# Altium PCB NumatoShieldPreRoute.PcbDoc
Units mm, origin at the board's own origin, x right, y up, seen from the top; angles counter-clockwise.
Board outline 127 x 127 mm, 4 copper layers (Top Layer, Mid-Layer 1, Mid-Layer 2, Bottom Layer); 8 components, 163 nets, 352 pads, 0 vias.
Unrouted connection lines stored in the file: 189.
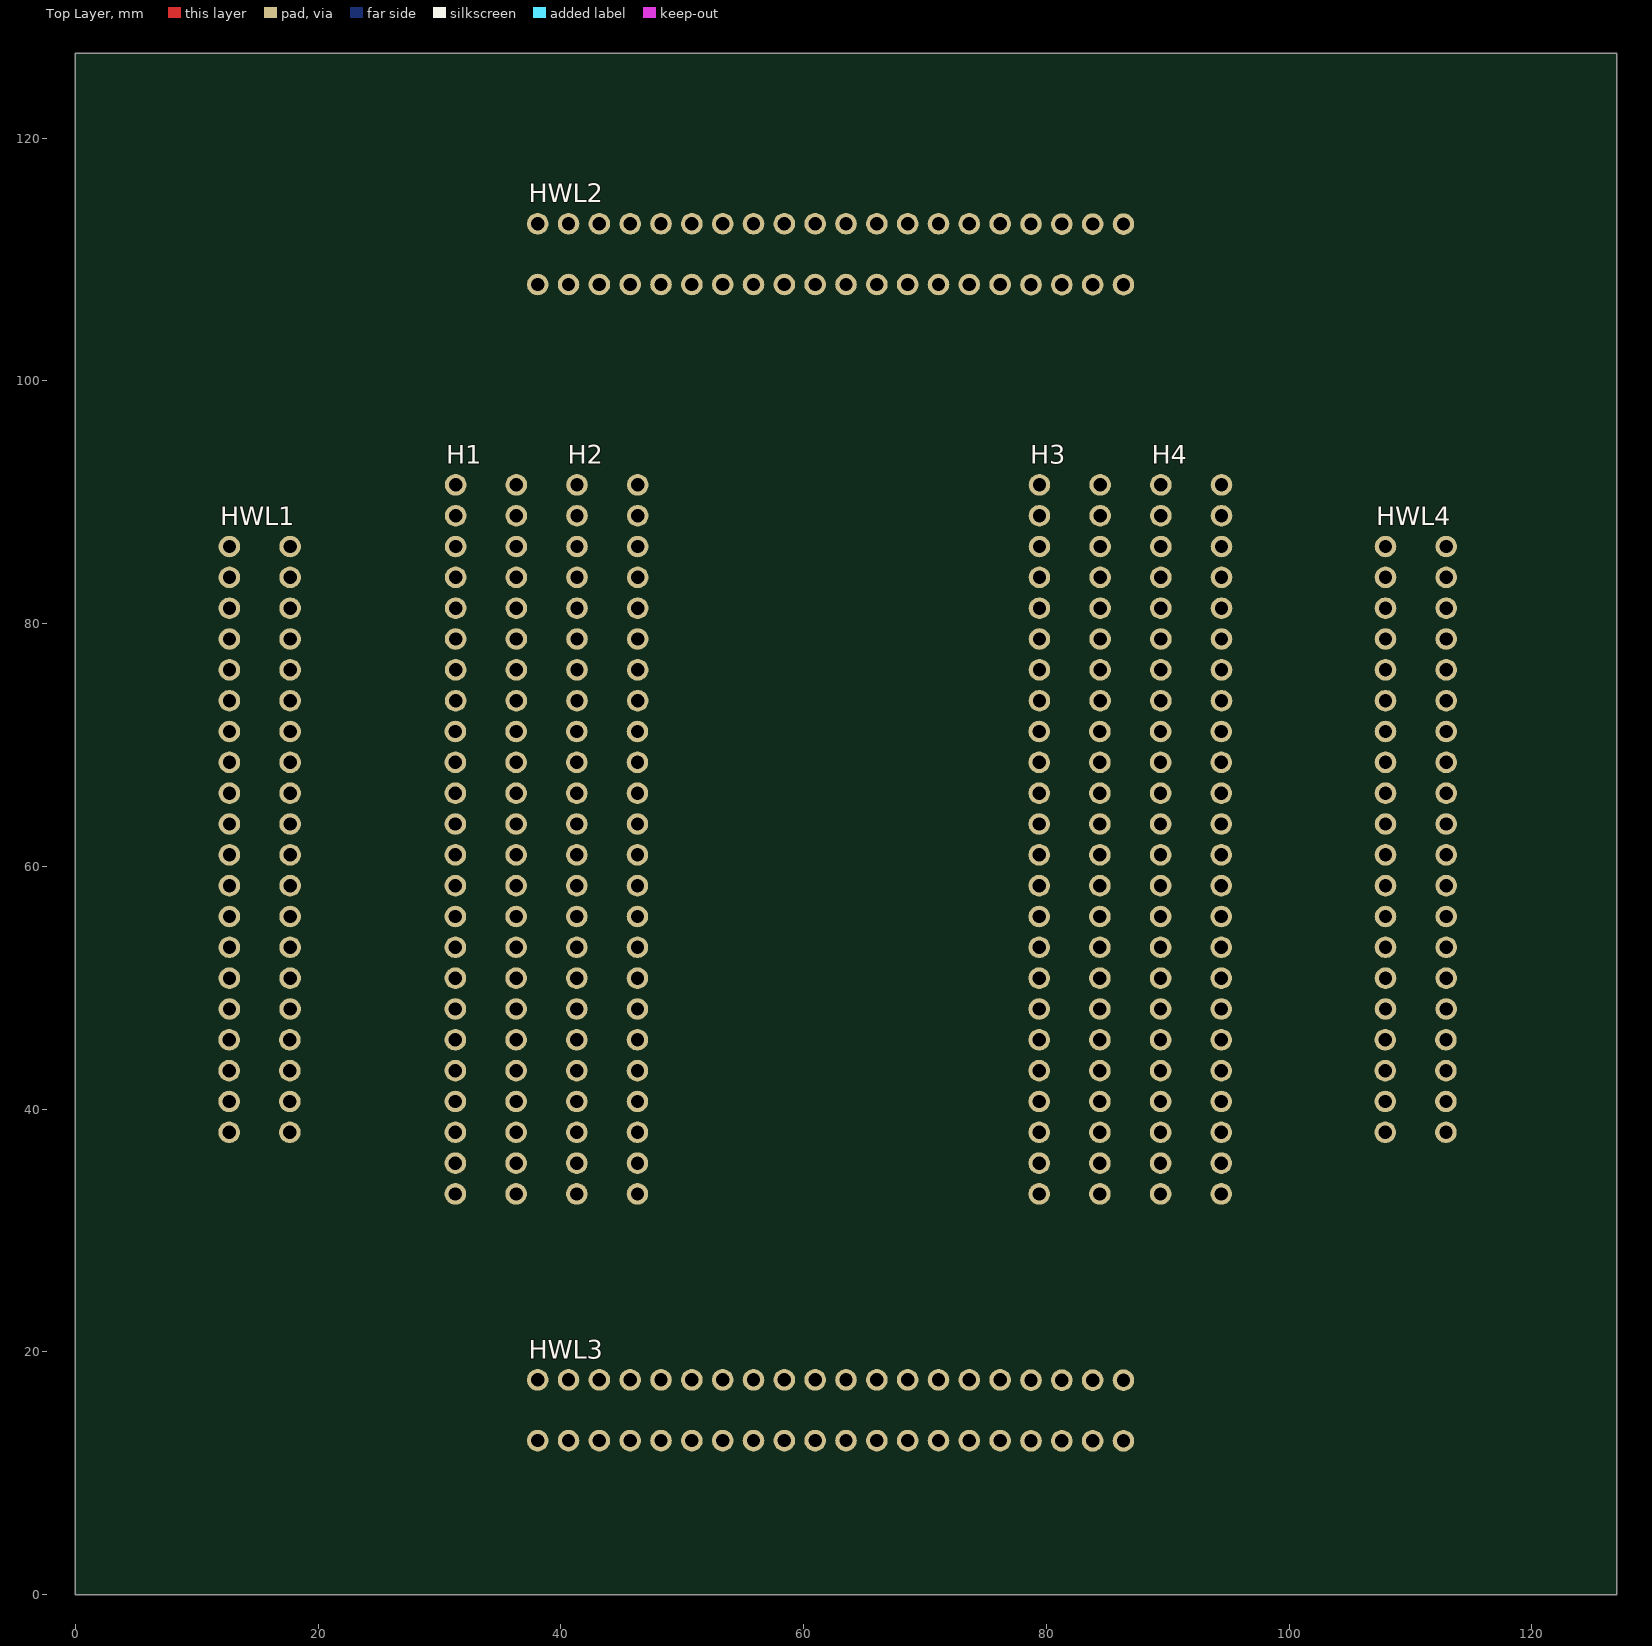
[diagram p0: Top Layer view]
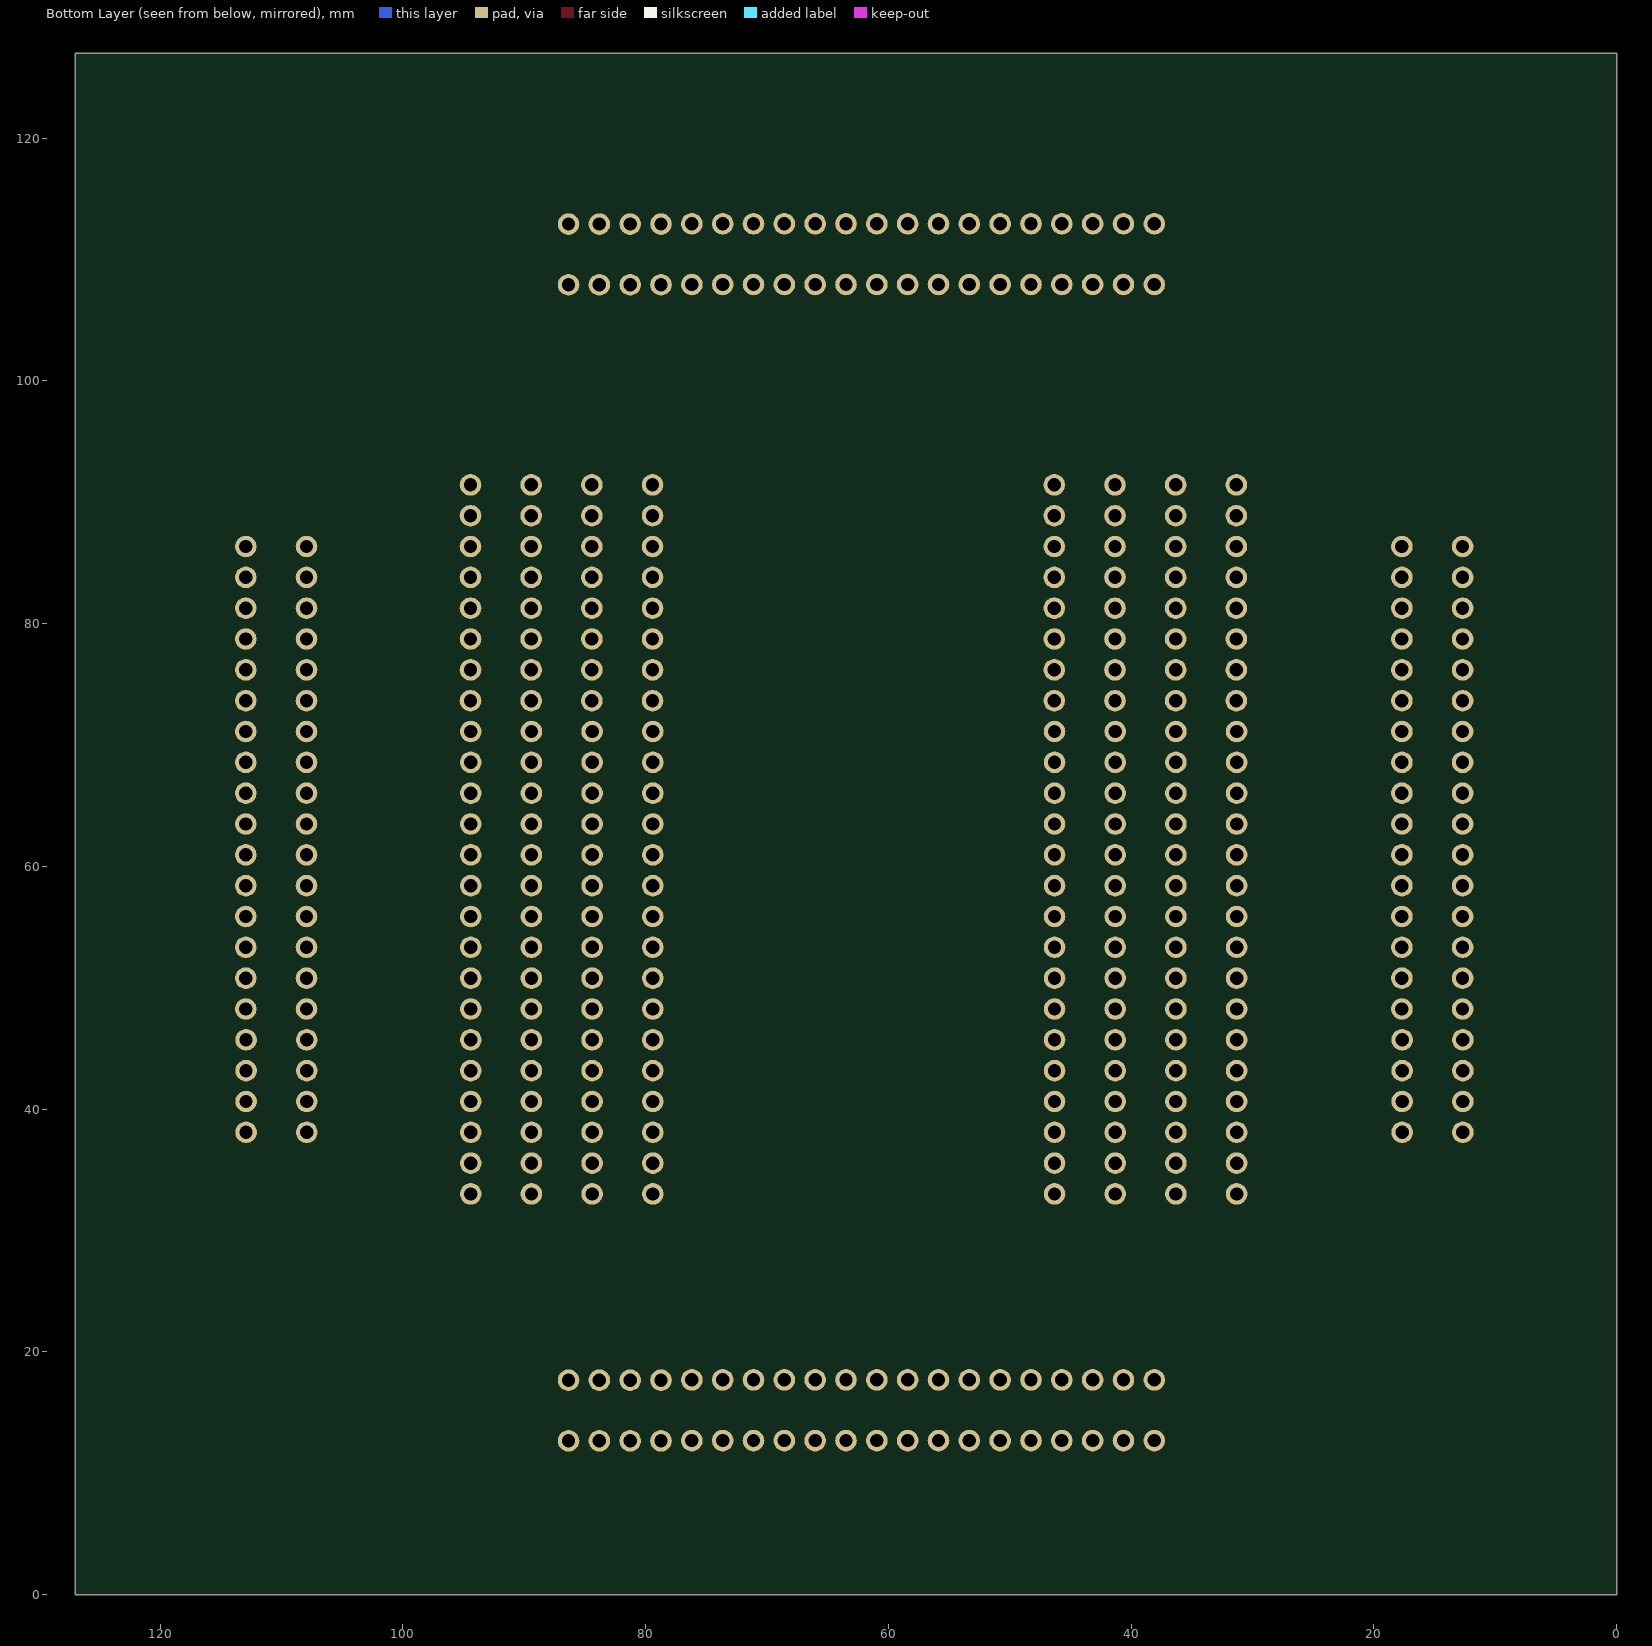
[diagram p1: Bottom Layer view, seen from below]

## Layer stack, top to bottom
Top Solder: solder mask 0.0102, Solder Resist, Dk 3.5
Top Layer: signal copper 0.0356
Dielectric 1: dielectric 0.32, FR-4, Dk 4.8
Mid-Layer 1: signal copper 0.0356
Dielectric2: dielectric 0.32, FR-4, Dk 4.8
Mid-Layer 2: signal copper 0.0356
Dielectric3: dielectric 0.32, FR-4, Dk 4.8
Bottom Layer: signal copper 0.0356
Bottom Solder: solder mask 0.0102, Solder Resist, Dk 3.5

## Board outline
0,0 127,0 127,127 0,127

## Design rules (kind name [scope] priority, off if disabled: settings)
Clearance [All] p1: gap=0.203
MatchedLengths [All] p1: tolerance=5.08 checknetsindiffpair=TRUE checkdiffpairvsdiffpair=TRUE checkothers=TRUE
PolygonConnect [All] p1: connectstyle=Relief reliefconductorwidth=0.254 reliefentries=4 polygonreliefangle="90 Angle" airgapwidth=0.254
RoutingVias [All] p1: holewidth=0.635 width=1.016 viastyle="Through Hole" minholewidth=0.711 minwidth=1.27 maxholewidth=0.711 maxwidth=1.27
SolderMaskExpansion [All] p1: expansion=0.102
Width [All] p1: maxlimit=0.203 minlimit=0.203 preferedwidth=0.203
29 further rules are at their usual default settings.

## Components (designator, comment, footprint, x,y, rotation, side; value= is the part's Value field where it differs from the comment)
H1 "HEADER2X48" H_FP 36.317,33.02 r90 top
H2 "HEADER2X48" H_FP 46.317,33.02 r90 top
H3 "HEADER2X48" H_FP 84.417,33.02 r90 top
H4 "HEADER2X48" H_FP 94.417,33.02 r90 top
HWL1 "71918-240LF" HWL_FP 12.7,86.36 r270 top
HWL2 "71918-240LF" HWL_FP 38.1,107.95 r0 top
HWL3 "71918-240LF" HWL_FP 38.1,12.7 r0 top
HWL4 "71918-240LF" HWL_FP 107.95,86.36 r270 top

## Footprints (in the part's own frame and the unit in brackets; to place one, negate y for a bottom-side part, rotate by r counter-clockwise, add the part's x,y. Pads: shape width x height; smd on the part's side, far side on the other; paste and mask are expansions set on the pad)
H_FP [mil]
  round 70 hole 43.31: 1(0,0) 2(0,196.85) 3(100,0) 4(100,196.85) 5(200,0) 6(200,196.85) 7(300,0) 8(300,196.85) 9(400,0) 10(400,196.85) 11(500,0) 12(500,196.85) 13(600,0) 14(600,196.85) 15(700,0) 16(700,196.85) 17(800,0) 18(800,196.85) 19(900,0) 20(900,196.85) 21(1000,0) 22(1000,196.85) 23(1100,0) 24(1100,196.85) 25(1200,0) 26(1200,196.85) 27(1300,0) 28(1300,196.85) 29(1400,0) 30(1400,196.85) 31(1500,0) 32(1500,196.85) 33(1600,-0.84) 34(1600,196.01) 35(1700,-0.84) 36(1700,196.01) 37(1800,-0.84) 38(1800,196.01) 39(1900,-0.84) 40(1900,196.01) 41(2000,-0.84) 42(2000,196.01) 43(2100,-0.84) 44(2100,196.01) 45(2200,-0.84) 46(2200,196.01) 47(2300,-0.84) 48(2300,196.01)
HWL_FP [mil]
  round 70 hole 43.31: 0(0,0) 1(100,0) 2(200,0) 3(300,0) 4(400,0) 5(500,0) 6(600,0) 7(700,0) 8(800,0) 9(900,0) 10(1000,0) 11(1100,0) 12(1200,0) 13(1300,0) 14(1400,0) 15(1500,0) 16(1600,-0.83) 17(1700,-0.83) 18(1800,-0.83) 19(1900,-0.83) 20(1900,196.02) 21(1800,196.02) 22(1700,196.02) 23(1600,196.02) 24(1500,196.85) 25(1400,196.85) 26(1300,196.85) 27(1200,196.85) 28(1100,196.85) 29(1000,196.85) 30(900,196.85) 31(800,196.85) 32(700,196.85) 33(600,196.85) 34(500,196.85) 35(400,196.85) 36(300,196.85) 37(200,196.85) 38(100,196.85) 39(0,196.85)

## Part data
HWL1 HWL2 HWL3 HWL4: "CONN HEADER 40POS DUAL VERT PCB"

## Nets (pads, with @x,y where several pads share a name; then routed paths per layer and width w, separated by ;. In a path a pad name is that pad's centre, name@x,y a point inside that pad or via, vN(x,y) a via of type N, cw(c..) or ccw(c..) an arc to the next point about the centre after c; other vN are vias at no path point)
3V3: H1.1 H1.2 H1.47 H2.1 H2.2 H3.3 H4.3 H4.48
A2: H2.6 HWL2.20
A3: H1.6 HWL1.20
A4: H2.8 HWL2.21
A5: H1.8 HWL1.21
A6: H1.10 HWL1.22
A7: H2.12 HWL2.23
A8: H2.14 HWL2.24
A9: H2.18 HWL2.26
A10: H1.20 HWL1.27
A11: H2.22 HWL2.28
A12: H2.28 HWL2.30
A13: H1.30 HWL1.31
A14: H1.32 HWL1.32
A15: H1.34 HWL1.33
A16: H2.36 HWL2.34
ACBUS0: H3.48
ACBUS1: H3.47
ACBUS2: H3.46
ACBUS3: H3.45
ACBUS4: H3.44
ACBUS5: H3.43
ACBUS6: H3.42
ACBUS7: H3.41
B2: H2.5 HWL2.19
B3: H1.5 HWL1.19
B4: H2.7 HWL2.18
B6: H1.9 HWL1.17
B8: H2.13 HWL2.15
B9: H2.17 HWL2.13
B11: H2.21 HWL2.11
B12: H2.27 HWL2.9
B14: H1.31 HWL1.7
B16: H2.35 HWL2.5
C5: H1.7 HWL1.18
C6: H2.10 HWL2.22
C7: H2.11 HWL2.16
C8: H1.14 HWL1.24
C9: H1.18 HWL1.26
C10: H1.19 HWL1.12
C11: H2.26 HWL2.29
C12: H1.28 HWL1.30
C13: H1.29 HWL1.8
C14: H2.34 HWL2.33
C15: H1.33 HWL1.6
C17: H1.35 HWL1.5
C18: H1.36 HWL1.34
D6: H2.9 HWL2.17
D8: H1.13 HWL1.15
D9: H1.17 HWL1.13
D11: H2.25 HWL2.10
D12: H1.27 HWL1.9
D14: H2.33 HWL2.6
D17: H2.37 HWL2.4
D18: H2.38 HWL2.35
E6: H1.12 HWL1.23
E7: H2.15 HWL2.14
E8: H2.16 HWL2.25
E11: H1.26 HWL1.29
E12: H2.30 HWL2.31
E13: H2.32 HWL2.32
E16: H1.37 HWL1.4
E18: H1.38 HWL1.35
F7: H1.11 HWL1.16
F8: H1.16 HWL1.25
F9: H2.20 HWL2.27
F10: H1.22 HWL1.28
F11: H1.25 HWL1.10
F12: H2.29 HWL2.8
F13: H2.31 HWL2.7
F14: H1.41 HWL1.2
F15: H1.39 HWL1.3
F16: H1.40 HWL1.36
F17: H2.39 HWL2.3
F18: H2.40 HWL2.36
G8: H1.15 HWL1.14
G9: H2.19 HWL2.12
G11: H1.21 HWL1.11
G13: H1.46 HWL1.39
G14: H1.42 HWL1.37
G16: H2.41 HWL2.2
G18: H2.42 HWL2.37
GND: H1.3 H1.4 H1.23 H1.24 H1.48 H2.3 H2.4 H2.23 H2.24 H2.47 H3.1 H3.2 H3.23 H3.24 H3.25 H3.26 H4.1 H4.2 H4.23 H4.24 H4.25 H4.26 H4.47 HWL3.7 HWL3.8 HWL3.18 HWL3.19 HWL3.20 HWL3.21 HWL3.31 HWL3.32 HWL4.10 HWL4.29
H12: H1.45 HWL1.0
H13: H2.43 HWL2.1
H14: H2.44 HWL2.38
H15: H1.43 HWL1.1
H16: H1.44 HWL1.38
INITB: H3.4
J13: H2.45 HWL2.0
K12: H4.46 HWL4.39
K13: H4.45 HWL4.0
K14: H2.46 HWL2.39
K15: H3.38 HWL3.38
K16: H3.37 HWL3.1
L12: H3.40 HWL3.39
L13: H3.39 HWL3.0
L14: H4.44 HWL4.38
L15: H4.40 HWL4.36
L16: H4.39 HWL4.3
M8: H4.16 HWL4.25
M10: H4.20 HWL4.27
M11: H4.28 HWL4.30
M13: H4.43 HWL4.1
M14: H4.42 HWL4.37
N5: H3.10 HWL3.24
N6: H4.12 HWL4.23
N7: H3.16 HWL3.27
N8: H4.15 HWL4.14
N9: H4.19 HWL4.12
N10: H3.22 HWL3.30
N11: H4.27 HWL4.9
N14: H4.41 HWL4.2
N15: H4.38 HWL4.35
N16: H4.37 HWL4.4
P6: H3.9 HWL3.15
P7: H4.11 HWL4.16
P8: H3.15 HWL3.12
P11: H3.21 HWL3.9
P15: H4.36 HWL4.34
P16: H4.35 HWL4.5
PROGB: H4.4
R3: H3.6 HWL3.22
R5: H3.8 HWL3.23
R7: H3.12 HWL3.25
R8: H4.18 HWL4.26
R10: H3.20 HWL3.29
R11: H3.28 HWL3.33
T3: H3.5 HWL3.17
T4: H4.6 HWL4.20
T5: H3.7 HWL3.16
T6: H4.10 HWL4.22
T7: H3.11 HWL3.14
T8: H4.17 HWL4.13
T9: H3.18 HWL3.28
T10: H3.19 HWL3.10
T11: H3.27 HWL3.6
T12: H3.30 HWL3.34
T14: H3.32 HWL3.35
T17: H3.36 HWL3.37
T18: H3.35 HWL3.2
U5: H4.8 HWL4.21
U7: H3.14 HWL3.26
U8: H4.14 HWL4.24
U11: H4.22 HWL4.28
U13: H4.30 HWL4.31
U15: H4.32 HWL4.32
U16: H3.34 HWL3.36
U17: H4.34 HWL4.33
U18: H4.33 HWL4.6
V4: H4.5 HWL4.19
V5: H4.7 HWL4.18
V6: H4.9 HWL4.17
V7: H3.13 HWL3.13
V8: H4.13 HWL4.15
V9: H3.17 HWL3.11
V11: H4.21 HWL4.11
V12: H3.29 HWL3.5
V13: H4.29 HWL4.8
V14: H3.31 HWL3.4
V15: H4.31 HWL4.7
V16: H3.33 HWL3.3
VCCIN: H2.48